# EAGLE board 20W-IR-Blaster_Simplified (EAGLE 9.6.2)
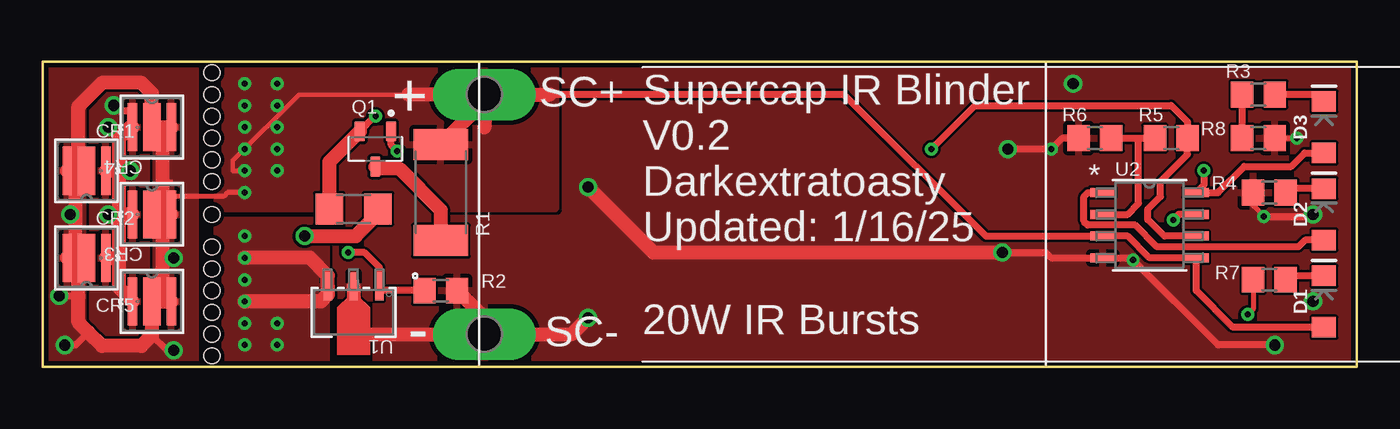
[diagram p0: board, top side]
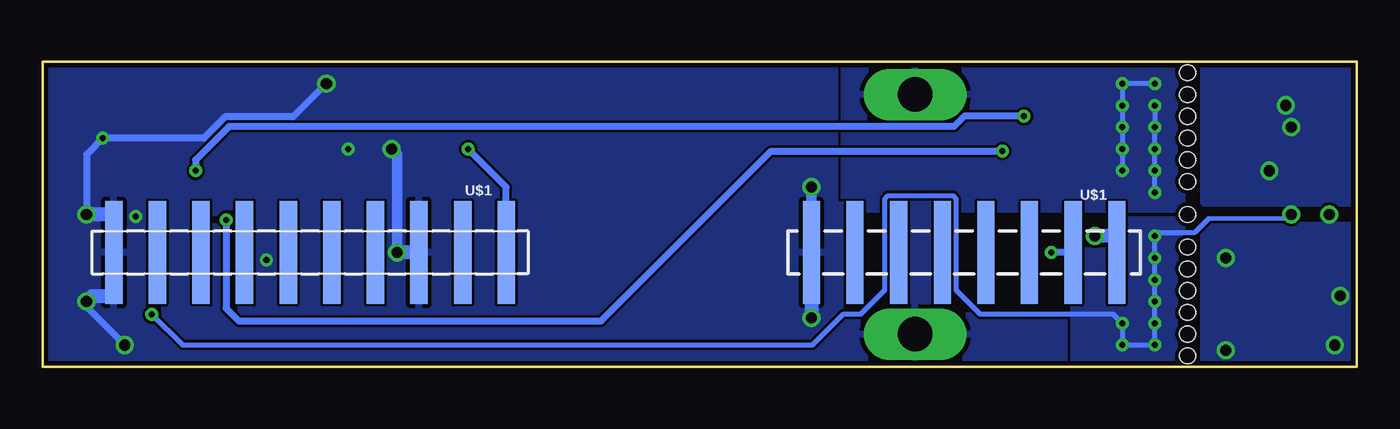
[diagram p1: board, bottom side, seen from below]

Size 76.52 x 17.78 mm. Coordinates in mm from the lower left corner, seen from the top.
Outline: 76.52,17.78 76.52,0 0,0 0,17.78 76.52,17.78
Copper layers (1*16): Top 0.035mm / dielectric 1.5mm / Bottom 0.035mm
Design rules "default *": minimum track width 6mil, minimum drill 0.35mm, track to track 6mil, track to pad 6mil, pad to pad 6mil, via to via 6mil, smd to smd 6mil, copper to edge 10mil, drill to drill 6mil, minimum pad ring 10mil, minimum via ring 8mil, stop-mask expansion 4mil, vias tented up to drill 0mil, thermal gap 10mil
Holes 0.9 mm at 9.84,10.79 9.84,8.89 9.84,6.99 9.84,12.06 9.84,13.34 9.84,14.61 9.84,15.88 9.84,17.14 9.84,5.71 9.84,4.45 9.84,3.17 9.84,1.91 9.84,0.64

## Footprints (pad centres in the part's own frame; a part is rotated, then mirrored left to right if it is on the bottom)
DIODE_VSMA1094250_VIS = smd 0.55 x 2.8: 1 -1.125,0; 3 1.125,0 | smd 1 x 2.8: 2 0,0
LED-1206 = smd 1.2 x 1.4: A -1.5,0; C 1.5,0
R1206 = smd 1.6 x 1.803: 1 -1.422,0; 2 1.422,0
AO3401 = smd 1.18 x 0.61: 1 -1.025,0.915; 2 -1.025,-0.915; 3 1.025,0
R2512 = smd 1.8 x 3.2: 1 -2.8,0; 2 2.8,0
R0805 = smd 1.3 x 1.5: 1 -0.95,0; 2 0.95,0
P1-20Y = drill 2.007 pad 2.54 long: TP 0,0
SOT89_NXP = smd 0.483 x 1.638: 1 0,-1.505; 2 1.5,-1.505; 3 -1.5,-1.505
SO8_STM = smd 1.46 x 0.533: 1 -2.724,1.905; 2 -2.724,0.635; 3 -2.724,-0.635; 4 -2.724,-1.905; 5 2.724,-1.905; 6 2.724,-0.635; 7 2.724,0.635; 8 2.724,1.905
BOTH-SMD = smd 1.02 x 6 bottom: 1 7.62,0; 2 10.16,0; 3 12.7,0; 4 15.24,0; 5 17.78,0; 6 20.32,0; 7 22.86,0; 8 25.4,0; 9 27.94,0; 10 30.48,0 | smd 1 x 6 bottom: 19 -27.94,-0.001; 20 -22.86,-0.001; 21 -20.32,0.001; 22 -17.78,-0.001; 23 -15.24,0.001; 24 -12.7,-0.001; 25 -10.16,0.001; 26 -25.4,-0.001

## Placement (x,y rotation side)
CR1  VSMA1094250  [DIODE_VSMA1094250_VIS]  6.35,13.97 0 top
CR2  VSMA1094250  [DIODE_VSMA1094250_VIS]  6.35,8.89 0 top
CR3  VSMA1094250  [DIODE_VSMA1094250_VIS]  2.54,6.35 180 top
CR4  VSMA1094250  [DIODE_VSMA1094250_VIS]  2.54,11.43 180 top
CR5  VSMA1094250  [DIODE_VSMA1094250_VIS]  6.35,3.81 0 top
D1  Blue  [LED-1206]  74.61,3.81 90 top
D2  Green  [LED-1206]  74.61,8.89 90 top
D3  Amber  [LED-1206]  74.61,13.97 90 top
F1  FUSE  [R1206]  18.1,9.21 180 top
Q1  AO3401  [AO3401]  19.37,12.7 270 top
R1  5R  [R2512]  23.18,10.16 90 top
R2  2K7  [R0805]  23.18,4.45 180 top
R3  2K7  [R0805]  70.8,15.88 0 top
R4  2K7  [R0805]  71.44,10.16 180 top
R5  2K7  [R0805]  65.72,13.34 0 top
R6  27K  [R0805]  61.28,13.34 0 top
R7  2K7  [R0805]  71.44,5.08 0 top
R8  1K  [R0805]  70.8,13.34 180 top
SC+  PTR1PAD1-20Y  [P1-20Y]  25.72,15.88 90 top
SC-  PTR1PAD1-20Y  [P1-20Y]  25.72,1.91 90 top
U1  BSS87  [SOT89_NXP]  18.1,3.17 180 top
U2  LM393DT  [SO8_STM]  64.45,8.26 0 top
U$1  BOTH-SMD  [BOTH-SMD]  41.91,6.67 0 top

## Library data of the parts
CR1-CR5 = VSMA1094250; COPYRIGHT: Copyright (C) 2025 Ultra Librarian. All rights reserved.; MANUFACTURER_PART_NUMBER: VSMA1094250; MFR_NAME: Vishay
D1 = SparkFun-LED; PROD_ID: DIO-09911
D2 = SparkFun-LED; PROD_ID: DIO-00862
D3 = SparkFun-LED; PROD_ID: DIO-09912
F1 R1-R8 = rcl; SPICEPREFIX: R
Q1 = DMG2305UX-7; MANUFACTURER: Diodes Inc.; MAXIMUM_PACKAGE_HEIGHT: 1.1mm; PARTREV: 09/2018; STANDARD: IPC-7351B
SC+ SC- = testpad
U1 = AP4438; COPYRIGHT: Copyright (C) 2025 Ultra Librarian. All rights reserved.; DIGIKEY_PART_NUMBER_1: 568-6228-2-ND; DIGIKEY_PART_NUMBER_2: 568-6228-1-ND; DIGIKEY_PART_NUMBER_3: 568-6228-6-ND; DIGIKEY_PART_NUMBER_4: BSS87INTR-ND; MANUFACTURER_PART_NUMBER: BSS87; MFR_NAME: NXP
U2 = LM393DTR; COPYRIGHT: Copyright (C) 2025 Ultra Librarian. All rights reserved.; MANUFACTURER_PART_NUMBER: LM393DT; MFR_NAME: STMicroelectronics
U$1 = Flipper-Zero-GPIO-Headers

## Nets
5VIN: F1.1 U$1.19
+3V3: R5.2 U2.6 U$1.1
GND: R2.1 R4.2 R6.1 R8.1 SC-.TP U1.1 U2.4 U$1.3 U$1.10 U$1.25
INPUT: R2.2 U1.3 U$1.26
N$1: Q1.3 R1.1
N$2: CR1.2 CR1.3 CR2.2 CR2.3 CR3.2 CR3.3 CR4.2 CR4.3 CR5.2 CR5.3 D1.A R1.2 SC+.TP U2.3 U2.5
N$3: D2.A U2.1
N$4: R5.1 R6.2 U2.2
N$5: Q1.1 U2.7
N$6: D2.C R4.1
N$7: D1.C R7.2
N$8: D3.C R3.2
N$9: R3.1 R8.2
N$11: D3.A F1.2 Q1.2 U2.8
N$13: CR1.1 CR2.1 CR3.1 CR4.1 CR5.1 R7.1 U1.2

## Tracks (layer width: path | path; a pad name or v marks a point on that pad's centre or on a via)
5VIN  (via drill 0.65)
  Top 0.813: v15.24,7.62 18.21,7.62 19.52,8.93 F1.1
  Bottom 0.813: U$1.19 13.97,7.62 v15.24,7.62
+3V3  (via drill 0.35)
  Top 0.406: v51.75,12.7 54.29,15.24 65.72,15.24 66.67,14.29 R5.2 66.67,12.38 65.09,10.79 65.09,9.93 64.35,9.19 64.35,8.59 65.32,7.62 U2.6
  Bottom 0.406: U$1.1 49.53,10.48 v51.75,12.7
GND  (via drill 0.35, 0.65)
  Top 0.305: U2.4 61.91,6.35 63.37,6.35 | R4.2 70.49,9.4 v71.12,8.76 | R8.1 v73.03,13.34
  Top 0.406: R6.1 59.37,13.34 v58.74,12.7 v56.2,12.7 | v55.88,6.67 58.42,6.67 58.74,6.35 61.91,6.35 | v71.75,1.27 68.45,1.27 v63.5,6.22 63.37,6.35 U2.4 | v71.12,8.76 73.85,8.76 v73.98,8.89
  Top 0.813: U1.1 18.1,1.91 SC-.TP | R2.1 25.72,2.85 SC-.TP | SC-.TP 30.8,1.91 v31.75,2.86 | v31.75,10.48 35.56,6.67 v55.88,6.67
  Bottom 0.406: v71.75,1.27 73.98,3.49 v73.98,3.81 | v73.98,8.89 73.98,12.38 v73.03,13.34 67.15,13.34 65.91,14.57 61.94,14.57 v60.01,16.51
  Bottom 0.61: v56.2,12.7 55.88,12.38 v55.88,6.67 | U$1.25 v31.75,10.48
  Bottom 0.813: v73.98,8.89 72.39,8.89 U$1.10 72.39,4.13 73.66,4.13 v73.98,3.81 | U$1.3 v55.88,6.67 | U$1.25 v31.75,2.86
  pour Top (rank 3): 10.16,17.78 76.52,17.78 76.52,0 10.16,0
  pour Bottom (rank 3): 10.16,17.78 76.52,17.78 76.52,0 10.16,0
INPUT  (via drill 0.35)
  Top 0.406: v17.78,6.67 18.73,6.67 19.6,5.8 U1.3 19.83,4.45 R2.2
  Bottom 0.406: U$1.26 v17.78,6.67
N$1
  Top 0.813: Q1.3 19.49,11.55 20.77,11.55 23.18,9.13 R1.1
N$2  (via drill 0.35, 0.65)
  Top 0.254: 6.99,10.79 7.46,10.79 | 11.06,11.43 11.06,12.01 14.92,15.88 SC+.TP
  Top 0.305: 11.06,11.43 v11.75,11.43 | v11.75,10.16 10.74,10.16 10.52,9.94 7.4,9.94 6.99,9.53
  Top 0.406: v7.62,6.35 6.99,6.35 | v7.62,0.95 7.23,0.95 6.35,1.83 | v1.27,1.27 1.91,1.27 2.65,2.02 | v0.95,4.13 2.06,4.13 | v1.59,8.89 1.91,8.89 | D1.A 69.31,2.31 67.18,4.45 U2.5 64.45,6.35 63.18,7.62 U2.3 54.93,7.62 46.67,15.88 29.53,15.88
  Top 0.813: R1.2 25.72,15.5 SC+.TP | CR5.2 CR5.3 | CR2.2 6.99,8.89 | CR2.3 6.99,8.89 | 6.99,13.97 CR1.2 6.35,15.95 5.73,16.56 3.45,16.56 2.06,15.18 2.06,11.9 CR4.2 1.91,11.43 | 6.99,13.97 CR1.3 | CR5.2 6.99,4.45 6.99,6.35 6.99,8.89 | 6.99,8.89 6.99,9.53 6.99,10.79 6.99,13.97 | 1.91,11.43 CR4.3 | 1.91,6.35 CR3.2 2.06,5.88 2.06,4.13 2.06,2.6 2.65,2.02 3.45,1.22 5.73,1.22 6.35,1.83 CR5.2 | 1.91,6.35 CR3.3 | 1.91,6.35 1.91,8.89 1.91,11.43 | SC+.TP 21.27,15.88 | SC+.TP 25.72,13.97 | SC+.TP 29.53,15.88
  Bottom 0.305: v11.75,16.51 v13.65,16.51 v13.65,15.24 v13.65,13.97 v13.65,12.7 v13.65,11.43 | v11.75,10.16 v11.75,11.43 v11.75,12.7 v11.75,13.97 v11.75,15.24
  pour Bottom: 0,0 8.89,0 8.89,8.26 0,8.26
  pour Top (rank 2): 0,0 8.89,0 8.89,17.78 0,17.78
  pour Top: 10.16,17.78 29.84,17.78 29.84,9.21 10.16,9.21
  pour Bottom: 10.16,17.78 29.84,17.78 29.84,9.21 10.16,9.21
N$3
  Top 0.406: D2.A 73.53,7.39 73.13,7 64.89,7 63.62,8.27 60.85,8.27 60.64,8.48 60.64,9.94 60.86,10.16 U2.1
N$4
  Top 0.406: R6.2 63.82,13.34 | 63.82,13.34 R5.1 | U2.2 63.18,8.89 63.82,9.53 63.82,13.34
N$5  (via drill 0.35)
  Top 0.406: U2.7 66.16,8.89 v65.85,8.58 v65.85,8.57 | v20.64,12.57 20.28,12.93 Q1.1
  Bottom 0.406: v65.85,8.57 65.85,3.42 65.11,2.68 44,2.68 34.1,12.57 v20.64,12.57
N$6
  Top 0.406: D2.C 72.62,10.39 R4.1
N$7
  Top 0.406: D1.C 72.62,5.31 R7.2
N$8
  Top 0.406: D3.C 74.21,15.88 R3.2
N$9
  Top 0.406: R8.2 R3.1
N$11  (via drill 0.35)
  Top 0.406: D3.A 73.49,12.47 72.71,11.68 69.97,11.68 68.45,10.16 U2.8 67.63,10.61 v67.63,11.43 | Q1.2 19.33,14.61 v19.37,14.61
  Top 0.813: Q1.2 16.68,11.95 F1.2
  Bottom 0.406: v19.37,14.61 22.85,14.61 23.44,14.01 65.68,14.01 67.63,12.06 v67.63,11.43
N$13  (via drill 0.35, 0.65)
  Top 0.305: R7.1 70.49,3.37 v70.17,3.05
  Top 0.406: v3.81,8.89 4.45,8.89 | v5.08,11.43 4.45,11.43 | v3.81,13.97 4.45,13.34 | v4.13,15.24 4.45,14.92 5.08,14.92 5.08,13.97
  Top 0.813: CR5.1 4.45,4.59 4.45,6.35 | 4.45,6.35 4.45,8.89 | 4.45,8.89 4.45,11.43 | 4.45,11.43 4.45,13.34 5.08,13.97 CR1.1 | CR4.1 4.45,11.43 | CR2.1 4.45,8.89 | CR3.1 4.45,6.35 | v11.75,3.81 16.19,3.81 16.6,4.21 U1.2 16.6,5.31 15.56,6.35 v11.75,6.35
  Bottom 0.254: 8.62,8.64 4.06,8.64 v3.81,8.89
  Bottom 0.305: v70.17,3.05 68.39,1.27 31.69,1.27 29.88,3.08 28.87,3.08 27.48,4.47 27.48,9.79 27.3,9.97 23.51,9.97 23.32,9.79 23.32,4.47 21.93,3.08 14.19,3.08 v13.65,2.54 v13.65,1.27 v11.75,1.27 v11.75,2.54 v11.75,3.81 v11.75,5.08 v11.75,6.35 v11.75,7.62 11.53,7.84 9.41,7.84 8.62,8.64
  pour Bottom: 0,17.78 0,9.53 8.89,9.53 8.89,17.78
  pour Top: 2.86,1.91 6.03,1.91 6.03,15.88 2.86,15.88
  pour Top (rank 2): 10.16,8.57 16.51,8.57 16.51,0 10.16,0
  pour Bottom (rank 2): 10.16,8.57 16.51,8.57 16.51,0 10.16,0

## Text on the board
tPlace: Supercap IR Blinder / V0.2 / Darkextratoasty / Updated: 1/16/25 | 20W IR Bursts
tNames: + | -